# Altium PCB PedalBoxREV2.PcbDoc (part 2 of 2)
Units mm, origin at the board's own origin, x right, y up, seen from the top; angles counter-clockwise.
Board outline 89.6 x 44.45 mm, 2 copper layers (Top Layer, Bottom Layer); 115 components, 87 nets, 418 pads, 92 vias.
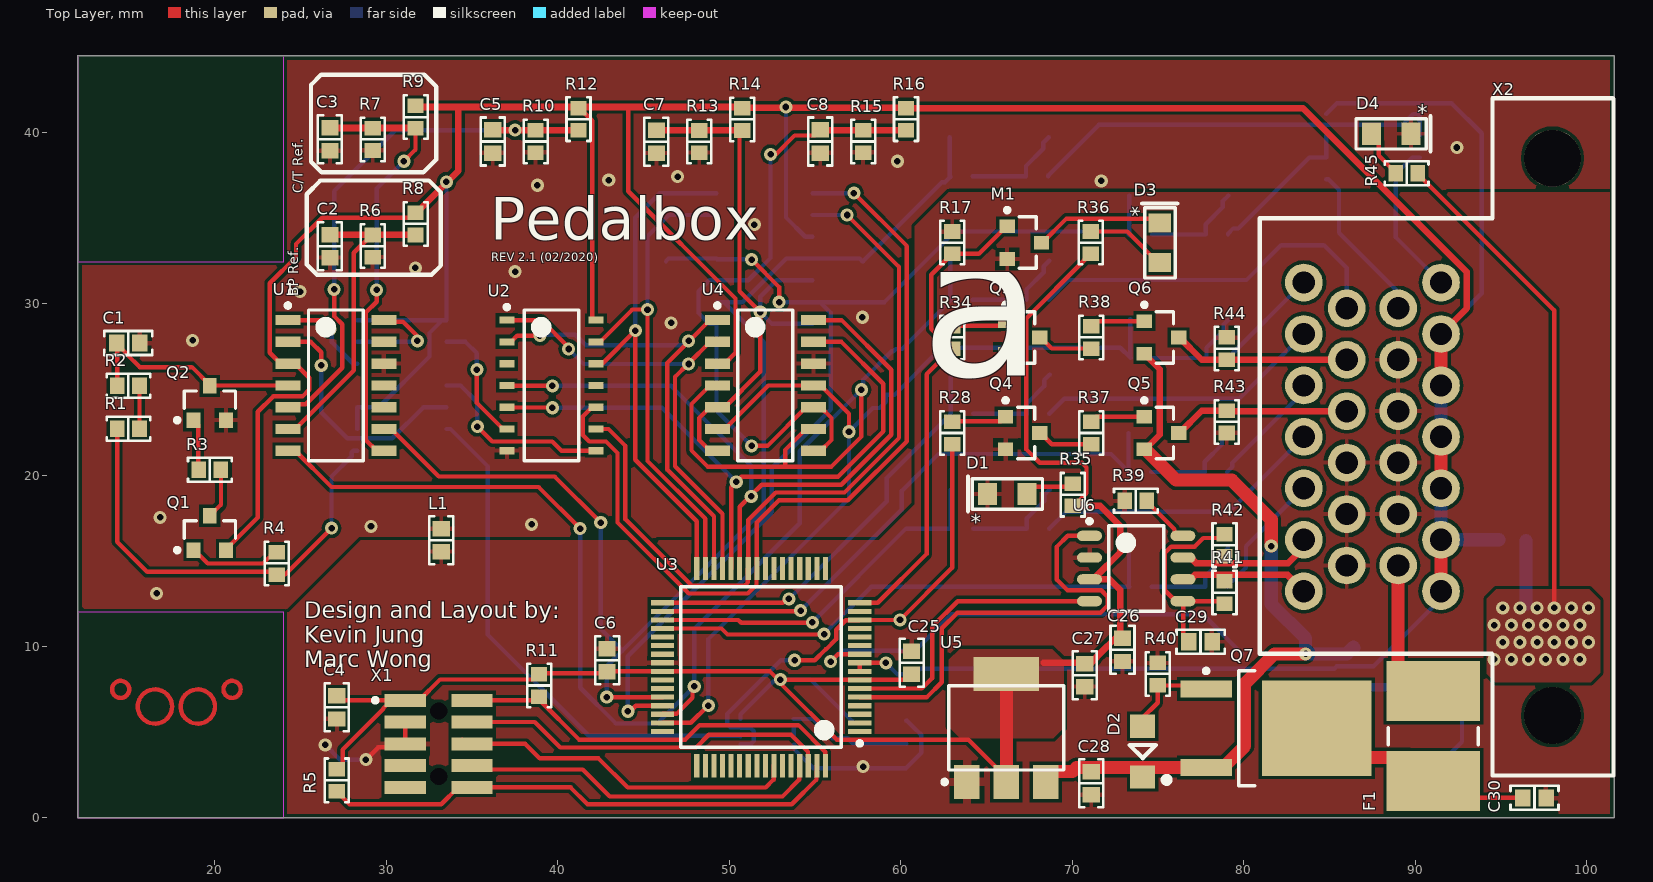
[diagram p0: Top Layer view]

## Via types
v1: diameter 0.762, hole 0.381, Top Layer to Bottom Layer, 92 vias

## Nets (pads, with @x,y where several pads share a name; then routed paths per layer and width w, separated by ;. In a path a pad name is that pad's centre, name@x,y a point inside that pad or via, vN(x,y) a via of type N, cw(c..) or ccw(c..) an arc to the next point about the centre after c; other vN are vias at no path point) (continued)
copper on no net: (continued)
  Top Layer w0.254: 15,7.5 ccw(c14.5,7.5) 15,7.5 ; 17.5,6.5 ccw(c16.5,6.5) 17.5,6.5 ; 20,6.5 ccw(c19,6.5) 20,6.5 ; 21.5,7.5 ccw(c21,7.5) 21.5,7.5

## Polygon pours and split planes (outlines as drawn)
DGND on Top Layer "Top Layer-No Net" (solid, pour order 31): 12,12 24.3,12 28.5,16.2 58.7,16.2 60.8,18.3 60.8,34.5 62.8,36.5 102.6,36.5 102.6,20.1 102.6,-1 13,-1 12,0
AGND on Top Layer "Top Layer-No Net 1" (solid, pour order 32): 0,12 26.475,12 30.129,15.654 103.6,15.654 103.6,44.9 100.9,47.6 13.7,47.6 -1.4,32.5 -1.4,12.9
LDO_OUT_5V_LDO_Analog on Top Layer "Top Layer-LDO_OUT_5V_LDO_Digital" (solid, pour order 0): 100.15,13.325 94.713,13.325 94.175,12.787 94.175,8.425 94.675,7.925 100.225,7.925 100.775,8.475 100.775,12.7
LDO_OUT_5V_LDO_Digital on Top Layer "Top Layer-LDO_OUT_5V_LDO_Digital" (solid, pour order 27): 63.425,9.85 68.825,9.85 69.5,9.175 69.5,5.25 68.9,4.65 63.475,4.65 62.8,5.325 62.8,9.225
LDO_OUT_5V_LDO_Analog on Bottom Layer "Top Layer-LDO_OUT_5V_LDO_Digital" (solid, pour order 2): 100.15,13.325 93.875,13.325 91.05,10.5 91.05,5.527 91.652,4.925 95.5,4.925 96,5.425 96,6.825 97.1,7.925 100.225,7.925 100.775,8.475 100.775,12.7
AGND on Bottom Layer "Bottom Layer-No Net" (solid, pour order 33): 78.984,-3.2 -1.4,-3.2 -1.4,49 99.5,49 108.5,40 108.5,-3.2
no net on Bottom Solder "Top Layer-LDO_OUT_5V_LDO_Digital" (solid, pour order 15): 100.15,13.325 94.713,13.325 94.175,12.787 94.175,8.425 94.675,7.925 100.225,7.925 100.775,8.475 100.775,12.7
no net on Top Solder "Top Layer-LDO_OUT_5V_LDO_Digital" (solid, pour order 29): 100.15,13.325 94.713,13.325 94.175,12.787 94.175,8.425 94.675,7.925 100.225,7.925 100.775,8.475 100.775,12.7
LDO_OUT_5V_LDO_Digital on Top Solder (solid, pour order 27): 63.425,9.85 68.825,9.85 69.5,9.175 69.5,5.25 68.9,4.65 63.475,4.65 62.8,5.325 62.8,9.225

## Keep-outs
Keep-Out Layer:
  rectangle: 12,0 24,12
  rectangle: 12,32.45 24,44.45

## Silkscreen, mask and mechanical layers (free items; w line width, h text height)
Top Overlay:
  lines w0.254: 25.35,32.275 25.95,31.675 32.625,31.675 33.175,32.225 33.175,36.475 32.475,37.175 26.15,37.175 25.35,36.375 25.35,32.275 ; 25.6,38.275 25.6,42.75 26.2,43.35 32.2,43.35 32.9,42.65 32.9,38.4 32.15,37.65 26.225,37.65 25.6,38.275
  text "C/T Ref." at 25.325,36.435 h1 r90
  text "Pedalbox" at 36.041,33.725 h2.5
  text "REV 2.1 (02/2020)" at 36.1,32.475 h0.5
  text "BP Ref." at 25.075,30.425 h1 r90
  text "a" at 61.163,22.006 h20
  text "Design and Layout by: / Kevin Jung / Marc Wong" at 25.2,8.8 h0.95
Bottom Overlay:
  text "Small but Mighty" at 190.292,82.649 h1.5 r270
  text "Double Checking  / the Datasheet" at 95.15,8.585 h1.2 r270
Mechanical 15:
  lines w0.1: 101.6,32.45 101.601,32.45 ; 12,44.45 24,44.45 ; 12,44.45 12,44.45 ; 12,44.45 12,12 12,11.999 12,0 101.601,0 101.601,44.45 24,44.45 ; 24,44.45 24,44.45 ; 89.6,44.45 89.601,44.45
  lines w0.254: 77.6,12 77.601,12

## Text inside footprints (layer, text, board x,y; h text height)
D1: Top Overlay "*" at 64.676,18.392 h1.52 r180
D3: Top Overlay "*" at 74.592,35.074 h1.52 r90
D4: Top Overlay "*" at 90.124,40.408 h1.52